# Altium PCB 51.PcbDoc
Units mm, origin at the board's own origin, x right, y up, seen from the top; angles counter-clockwise.
Board outline 77.34 x 64.39 mm, 2 copper layers (Top Layer, Bottom Layer); 13 components, 42 nets, 105 pads, 0 vias.
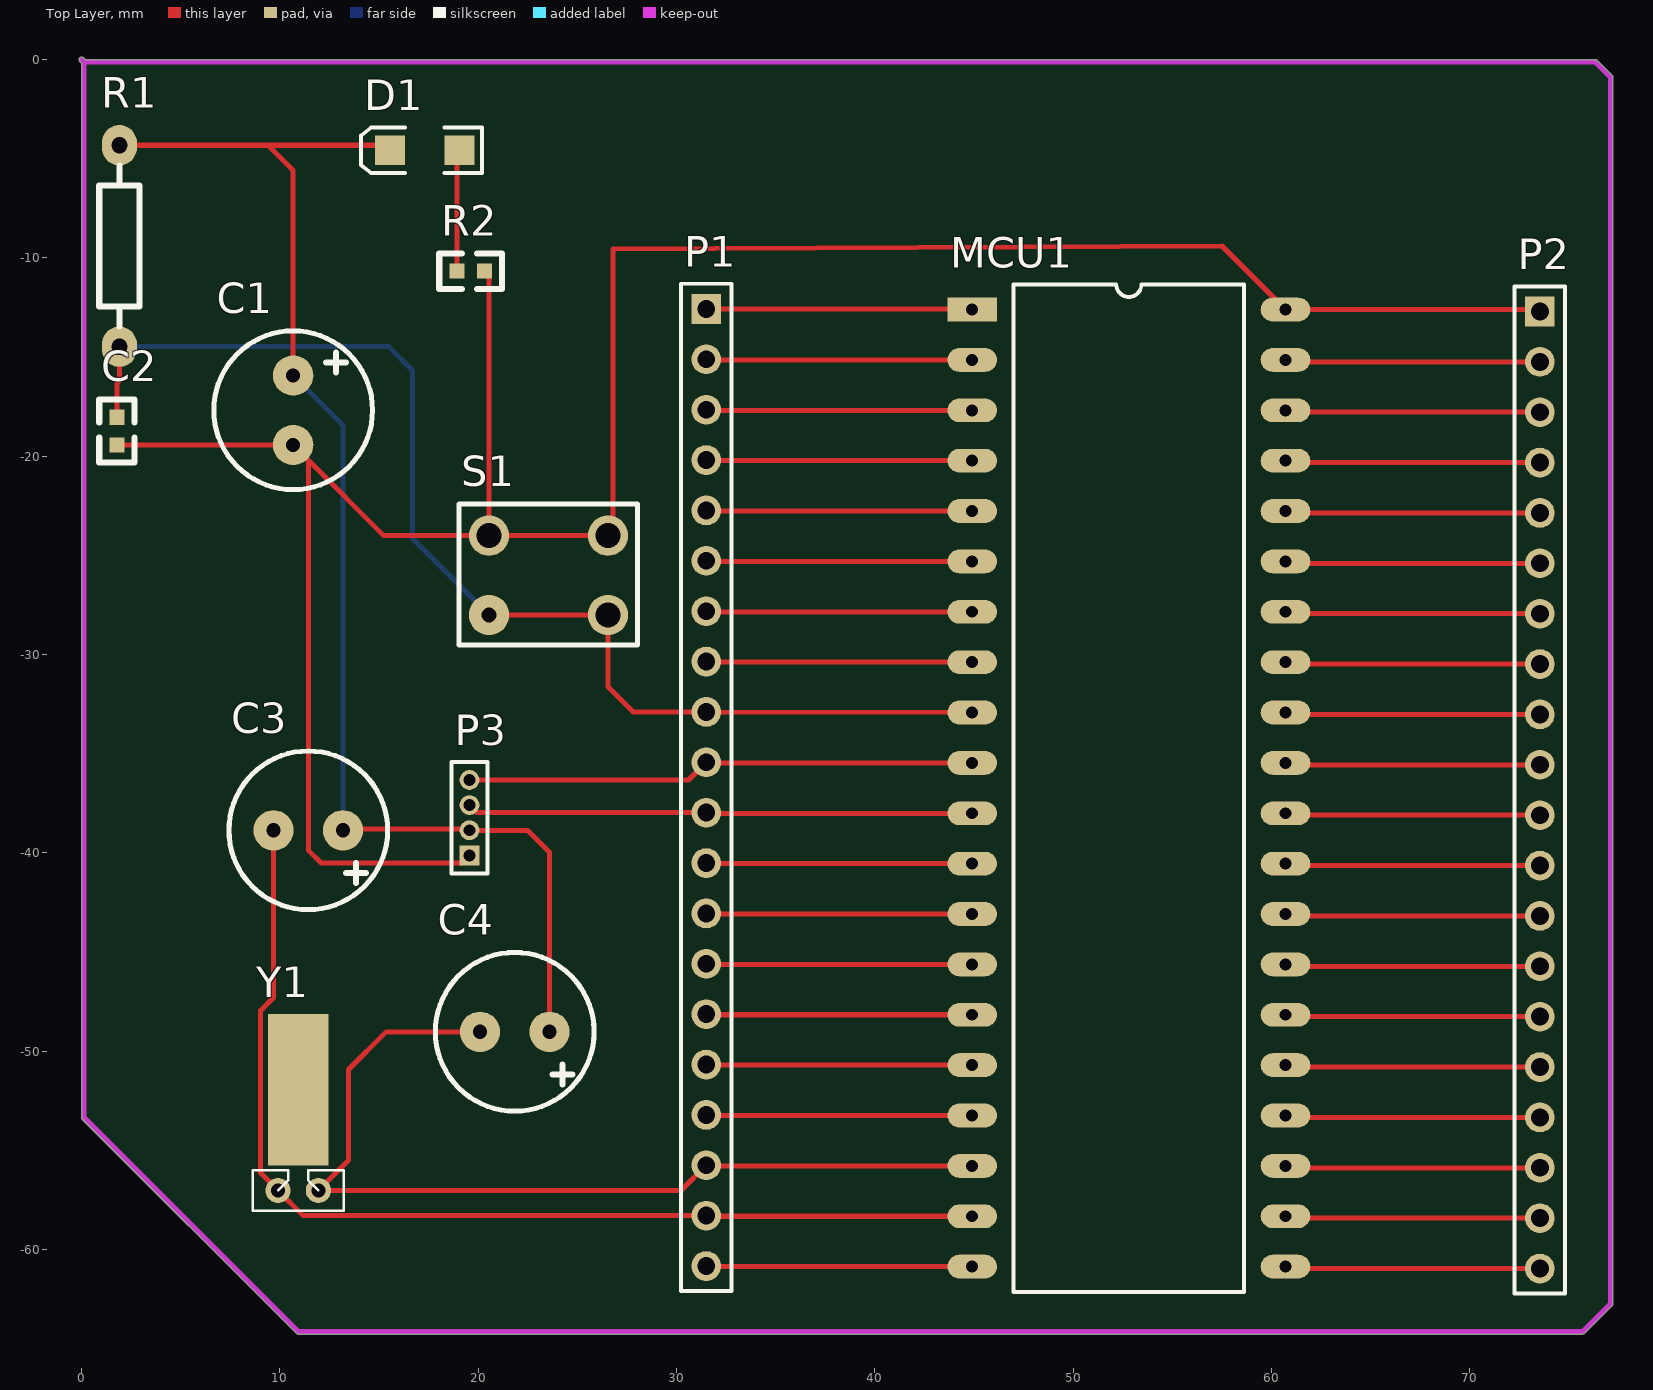
[diagram p0: Top Layer view]
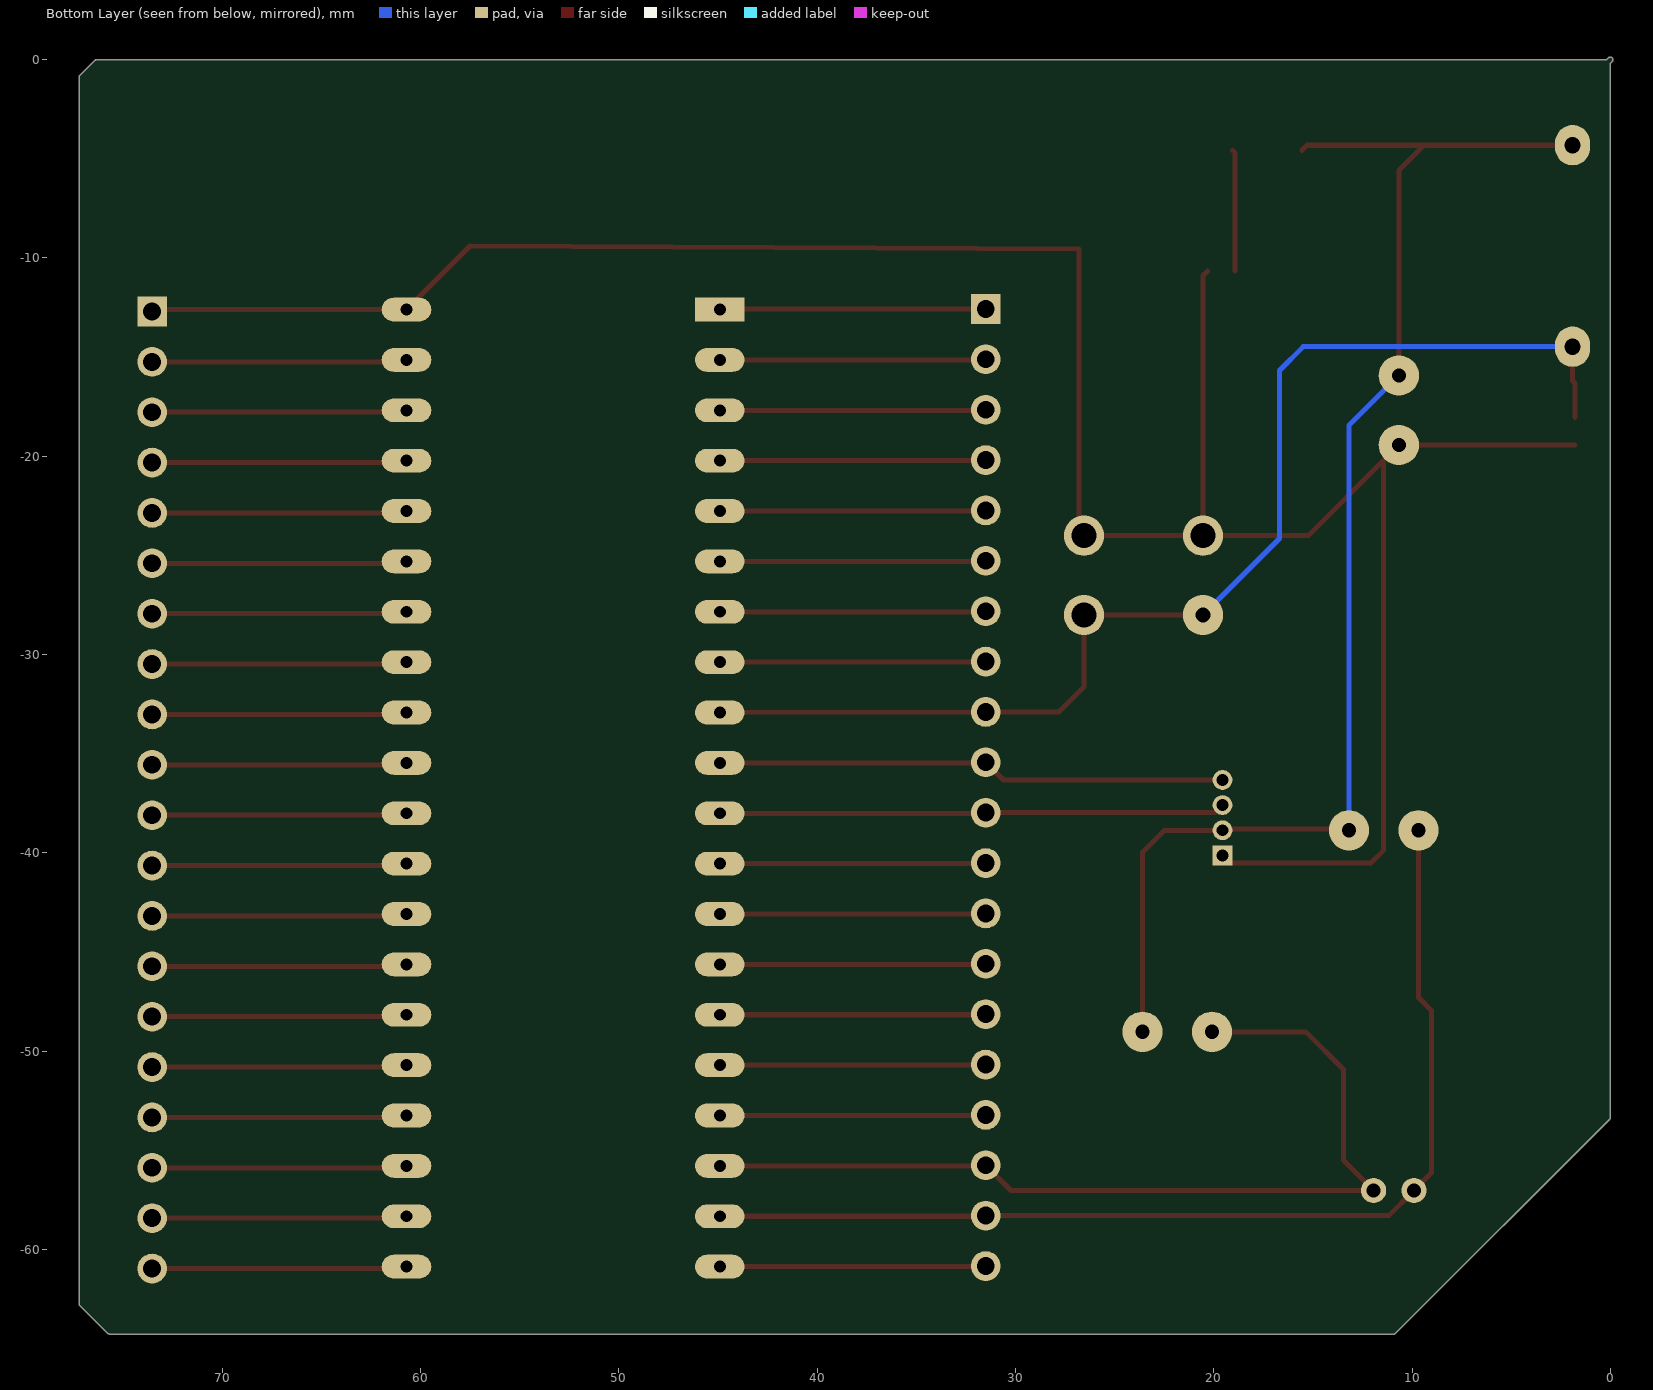
[diagram p1: Bottom Layer view, seen from below]

## Layer stack, top to bottom
Top Solder: solder mask 0.0102, Solder Resist, Dk 3.5
Top Layer: signal copper 0.0356
Dielectric 1: dielectric 0.32, FR-4, Dk 4.8
Bottom Layer: signal copper 0.0356
Bottom Solder: solder mask 0.0102, Solder Resist, Dk 3.5

## Board outline
0.037,-53.431 cw(c0.127,-53.34) 0,-53.34 0,-0.18 -0.09,-0.09 cw(c0,0) 0.09,0.09 0.18,0 76.327,0 cw(c76.327,-0.127) 76.418,-0.037 76.417,-0.037 77.179,-0.799 77.179,-0.798 cw(c77.089,-0.889) 77.216,-0.889 77.216,-62.738 cw(c77.089,-62.738) 77.179,-62.829 77.179,-62.828 75.782,-64.225 75.783,-64.225 cw(c75.692,-64.135) 75.692,-64.262 10.922,-64.262 cw(c10.922,-64.135) 10.831,-64.225 10.832,-64.225

## Design rules (kind name [scope] priority, off if disabled: settings)
Clearance [All] p1: gap=0.254 ignorepadtopadclearanceinfootprint=FALSE except(0: Arc-Hole Track-Hole SMDPad-Hole THPad-Hole Via-Hole Fill-Hole Poly-Hole Region-Hole Text-Hole)
PolygonConnect [All] p1: connectstyle=Relief reliefconductorwidth=0.254 reliefentries=4 polygonreliefangle="90 Angle" airgapwidth=0.254
RoutingVias [All] p1: holewidth=0.711 width=1.27 viastyle="Through Hole" minholewidth=0.711 minwidth=1.27 maxholewidth=0.711 maxwidth=1.27
SolderMaskExpansion [All] p1: expansion=0.102
Width [All] p1: maxlimit=0.254 minlimit=0.254 preferedwidth=0.254
30 further rules are at their usual default settings.

## Classes and differential pairs
component class 51: C1 C2 C4 D1 MCU1 P1 P2 P3 R1 R2 S1 Y1

## Components (designator, comment, footprint, x,y, rotation, side; value= is the part's Value field where it differs from the comment)
C1 "0.1uf" RB.15/.3 10.668,-17.681 r90 top
C2 "0.1uf" 0603 1.778,-18.098 r270 top
C3 "22pf" RB.15/.3 11.43,-38.862 r0 top
C4 "22pf" RB.15/.3 21.841,-49.022 r0 top
D1 "LED2" 3.2X1.6X1.1 17.3,-4.572 r180 top
MCU1 "51" 51-DIP40 44.906,-12.604 r0 top
P1 "Header 20" HDR1X20 31.496,-12.573 r270 top
P2 "Header 20" HDR1X20 73.533,-12.7 r270 top
P3 "MHDR1X4" MHDR1X4 19.558,-40.132 r90 top
R1 "10k" AXIAL0.4 1.905,-9.398 r270 top
R2 "10K" 0603 18.986,-10.668 r0 top
S1 "微动开关" KEY 20.543,-28.003 r90 top
Y1 "XTAL" XTAL1 9.906,-57.023 r0 top

## Footprints (in the part's own frame and the unit in brackets; to place one, negate y for a bottom-side part, rotate by r counter-clockwise, add the part's x,y. Pads: shape width x height; smd on the part's side, far side on the other; paste and mask are expansions set on the pad)
3.2X1.6X1.1 [mm] "SMT LED; 2 Flat Leads"
  rect 1.5x1.5 smd: 1(-1.75,0) 2(1.75,0)
  silkscreen extent -2.9,-1.15 3.2,1.15
51-DIP40 [mm]
  rect 2.5x1.2 hole 0.6: 1(0,0)
  oval 2.5x1.2 hole 0.6: 2(0,-2.54) 3(0,-5.08) 4(0,-7.62) 5(0,-10.16) 6(0,-12.7) 7(0,-15.24) 8(0,-17.78) 9(0,-20.32) 10(0,-22.86) 11(0,-25.4) 12(0,-27.94) 13(0,-30.48) 14(0,-33.02) 15(0,-35.56) 16(0,-38.1) 17(0,-40.64) 18(0,-43.18) 19(0,-45.72) 20(0,-48.26) 21(15.8,-48.26) 22(15.8,-45.72) 23(15.8,-43.18) 24(15.8,-40.64) 25(15.8,-38.1) 26(15.8,-35.56) 27(15.8,-33.02) 28(15.8,-30.48) 29(15.8,-27.94) 30(15.8,-25.4) 31(15.8,-22.86) 32(15.8,-20.32) 33(15.8,-17.78) 34(15.8,-15.24) 35(15.8,-12.7) 36(15.8,-10.16) 37(15.8,-7.62) 38(15.8,-5.08) 39(15.8,-2.54) 40(15.8,0)
  silkscreen extent 2.09,-49.53 13.72,1.27
0603 [mil]
  rect 30x30 smd: 1(-2.5,0) 2(52.5,0)
  silkscreen extent -38,-35 88,35
AXIAL0.4 [mil]
  oval 80x70 hole 32: 1(-200,0) 2(200,0)
  silkscreen extent -160,-40 160,40
HDR1X20 [mm] "Connector; Header; 20 Position"
  rect 1.5x1.5 hole 0.9: 1(0,0)
  round 1.5 hole 0.9: 2(2.54,0) 3(5.08,0) 4(7.62,0) 5(10.16,0) 6(12.7,0) 7(15.24,0) 8(17.78,0) 9(20.32,0) 10(22.86,0) 11(25.4,0) 12(27.94,0) 13(30.48,0) 14(33.02,0) 15(35.56,0) 16(38.1,0) 17(40.64,0) 18(43.18,0) 19(45.72,0) 20(48.26,0)
  silkscreen extent -1.27,-1.27 49.53,1.27
KEY [mil]
  round 80 hole 30: 1(0,0)
  round 80 hole 50: 1(0,-236.22) 2(157.48,0) 2(157.48,-236.22)
  silkscreen extent -60,-295 220,60
MHDR1X4 [mm] "Connector; Header; 4 Position"
  rect 1x1 hole 0.6: 1(0,0)
  round 1 hole 0.6: 2(1.27,0) 3(2.54,0) 4(3.81,0)
  silkscreen extent -0.9,-0.9 4.71,0.9
RB.15/.3 [mil]
  round 80 hole 28: 1(68.9,0) 2(-68.9,0)
  silkscreen extent -157,-157 157,157
XTAL1 [mil]
  rect 120x300 smd: 0(40,200)
  round 50 hole 28: 1(0,0) 2(80,0)
  silkscreen extent -50,-40 130,40

## Part data
C1 C2 C3 C4: library part C, "电容"
D1: "Typical RED, GREEN, YELLOW, AMBER GaAs LED", LatestRevisionDate=17-Jul-2002, LatestRevisionNote="Re-released for DXP Platform.", PackageDescription="SM LED; 2 Flat Leads", PackageReference=3.2X1.6X1.1, PackageVersion=Feb-2002, Published=8-Jun-2000, Publisher="Altium Limited"
MCU1: library part 51-DIP
P1 P2: "Header, 20-Pin", LatestRevisionDate=17-Jul-2002, LatestRevisionNote="Re-released for DXP Platform.", Publisher="Altium Limited"
P3: "Header, 4-Pin", LatestRevisionDate=17-Jul-2002, LatestRevisionNote="Re-released for DXP Platform.", Publisher="Altium Limited"
R1 R2: library part R, "电阻"
Y1: "晶振"

## Nets (pads, with @x,y where several pads share a name; then routed paths per layer and width w, separated by ;. In a path a pad name is that pad's centre, name@x,y a point inside that pad or via, vN(x,y) a via of type N, cw(c..) or ccw(c..) an arc to the next point about the centre after c; other vN are vias at no path point)
ALE: MCU1.30 P2.11 | length 12.9
  Top Layer w0.254: MCU1.30 60.802,-38.1 P2.11
EA/VPP: MCU1.31 P2.10 | length 12.9
  Top Layer w0.254: MCU1.31 60.802,-35.56 P2.10
GND: C1.1 C3.1 C4.1 D1.2 P3.2 R1.1 | length 69.9
  Top Layer w0.254: R1.1 9.398,-4.318 ; C1.1 10.668,-5.588 9.398,-4.318 ; C3.1 13.18,-38.798 19.494,-38.798 P3.2 22.479,-38.862 23.591,-39.974 C4.1 ; D1.2 15.296,-4.318 9.398,-4.318
  Bottom Layer w0.254: C1.1 13.18,-18.443 C3.1
INT0/P3.1: MCU1.12 P1.12 | length 13.4
  Top Layer w0.254: P1.12 31.527,-40.544 MCU1.12
INT1/P3.3: MCU1.13 P1.13 | length 13.4
  Top Layer w0.254: P1.13 31.527,-43.084 MCU1.13
NetD1_1: D1.1 R2.1 | length 6.1
  Top Layer w0.254: R2.1 18.923,-4.699 D1.1
P0.0/AD0: MCU1.39 P2.2 | length 12.9
  Top Layer w0.254: MCU1.39 60.802,-15.24 P2.2
P0.1/AD1: MCU1.38 P2.3 | length 12.9
  Top Layer w0.254: MCU1.38 60.802,-17.78 P2.3
P0.2/AD2: MCU1.37 P2.4 | length 12.9
  Top Layer w0.254: MCU1.37 60.802,-20.32 P2.4
P0.3/AD3: MCU1.36 P2.5 | length 12.9
  Top Layer w0.254: MCU1.36 60.802,-22.86 P2.5
P0.4/AD4: MCU1.35 P2.6 | length 12.9
  Top Layer w0.254: MCU1.35 60.802,-25.4 P2.6
P0.5/AD5: MCU1.34 P2.7 | length 12.9
  Top Layer w0.254: MCU1.34 60.802,-27.94 P2.7
P0.6/AD6: MCU1.33 P2.8 | length 12.9
  Top Layer w0.254: MCU1.33 60.802,-30.48 P2.8
P0.7/AD7: MCU1.32 P2.9 | length 12.9
  Top Layer w0.254: MCU1.32 60.802,-33.02 P2.9
P1.0: MCU1.1 P1.1 | length 13.4
  Top Layer w0.254: P1.1 44.875,-12.573 MCU1.1
P1.1: MCU1.2 P1.2 | length 13.4
  Top Layer w0.254: P1.2 31.527,-15.144 MCU1.2
P1.2: MCU1.3 P1.3 | length 13.4
  Top Layer w0.254: P1.3 31.527,-17.684 MCU1.3
P1.3: MCU1.4 P1.4 | length 13.4
  Top Layer w0.254: P1.4 31.527,-20.224 MCU1.4
P1.4: MCU1.5 P1.5 | length 13.4
  Top Layer w0.254: P1.5 31.527,-22.764 MCU1.5
P1.5: MCU1.6 P1.6 | length 13.4
  Top Layer w0.254: P1.6 31.527,-25.304 MCU1.6
P1.6: MCU1.7 P1.7 | length 13.4
  Top Layer w0.254: P1.7 31.527,-27.844 MCU1.7
P1.7: MCU1.8 P1.8 | length 13.4
  Top Layer w0.254: P1.8 31.527,-30.384 MCU1.8
P2.0/AD8: MCU1.21 P2.20 | length 12.9
  Top Layer w0.254: MCU1.21 60.802,-60.96 P2.20
P2.1/AD9: MCU1.22 P2.19 | length 12.9
  Top Layer w0.254: MCU1.22 60.802,-58.42 P2.19
P2.2/AD10: MCU1.23 P2.18 | length 12.9
  Top Layer w0.254: MCU1.23 60.802,-55.88 P2.18
P2.3/AD11: MCU1.24 P2.17 | length 12.9
  Top Layer w0.254: MCU1.24 60.802,-53.34 P2.17
P2.4/AD12: MCU1.25 P2.16 | length 12.9
  Top Layer w0.254: MCU1.25 60.802,-50.8 P2.16
P2.5/AD13: MCU1.26 P2.15 | length 12.9
  Top Layer w0.254: MCU1.26 60.802,-48.26 P2.15
P2.6/AD14: MCU1.27 P2.14 | length 12.9
  Top Layer w0.254: MCU1.27 60.802,-45.72 P2.14
P2.7/AD15: MCU1.28 P2.13 | length 12.9
  Top Layer w0.254: MCU1.28 60.802,-43.18 P2.13
PSEN: MCU1.29 P2.12 | length 12.9
  Top Layer w0.254: MCU1.29 60.802,-40.64 P2.12
RD/P3.7: MCU1.17 P1.17 | length 13.4
  Top Layer w0.254: P1.17 31.527,-53.244 MCU1.17
RST: C2.1 MCU1.9 P1.9 R1.2 S1.1 | length 61.3
  Top Layer w0.254: C2.1 1.778,-16.332 1.905,-16.205 R1.2 ; S1.1@20.543,-28.003 26.543,-28.003 26.543,-31.623 27.813,-32.893 P1.9 MCU1.9
  Bottom Layer w0.254: R1.2 15.494,-14.478 16.688,-15.672 16.688,-24.148 S1.1@20.543,-28.003
RXD/P3.0: MCU1.10 P1.10 P3.4 | length 25.7
  Top Layer w0.254: P3.4 30.607,-36.322 P1.10 31.527,-35.464 MCU1.10
T0/P3.4: MCU1.14 P1.14 | length 13.4
  Top Layer w0.254: P1.14 31.527,-45.624 MCU1.14
T1/P3.5: MCU1.15 P1.15 | length 13.4
  Top Layer w0.254: P1.15 31.527,-48.164 MCU1.15
TXD/P3.1: MCU1.11 P1.11 P3.3 | length 25.5
  Top Layer w0.254: P3.3 19.939,-37.973 P1.11 31.527,-38.004 MCU1.11
VCC: C1.2 C2.2 MCU1.40 P2.1 P3.1 R2.2 S1.2 | length 131
  Top Layer w0.254: C2.2 C1.2 11.43,-20.193 ; P3.1 19.185,-40.505 12.073,-40.505 11.43,-39.862 11.43,-20.193 ; R2.2 20.543,-10.891 S1.2@20.543,-24.003 ; P2.1 73.437,-12.604 MCU1.40 57.5,-9.398 26.797,-9.547 26.797,-23.749 26.543,-24.003 S1.2@20.543,-24.003 ; 11.43,-20.193 15.24,-24.003 S1.2@20.543,-24.003
VSS: MCU1.20 P1.20 | length 13.4
  Top Layer w0.254: P1.20 31.527,-60.864 MCU1.20
WR/P3.6: MCU1.16 P1.16 | length 13.4
  Top Layer w0.254: P1.16 31.527,-50.704 MCU1.16
XTAL1: C3.2 MCU1.19 P1.19 Y1.1 | length 54.3
  Top Layer w0.254: C3.2 9.68,-47.295 9.017,-47.958 9.017,-56.134 Y1.1 11.176,-58.293 P1.19 31.527,-58.324 MCU1.19
XTAL2: C4.2 MCU1.18 P1.18 Y1.2 | length 47.7
  Top Layer w0.254: C4.2 15.367,-49.022 13.462,-50.927 13.462,-55.499 Y1.2 30.226,-57.023 P1.18 31.527,-55.784 MCU1.18
pads on no net: Y1.0

## Keep-outs
Top Layer:
  lines w0.254: 0.127,-0.127 0,0 0.127,-0.127 ; 0.127,-0.127 0.127,-53.34 10.922,-64.135 75.692,-64.135 77.089,-62.738 77.089,-0.889 76.327,-0.127 0.127,-0.127